# EAGLE board PWM sheild lilyGO (EAGLE 9.6.2)
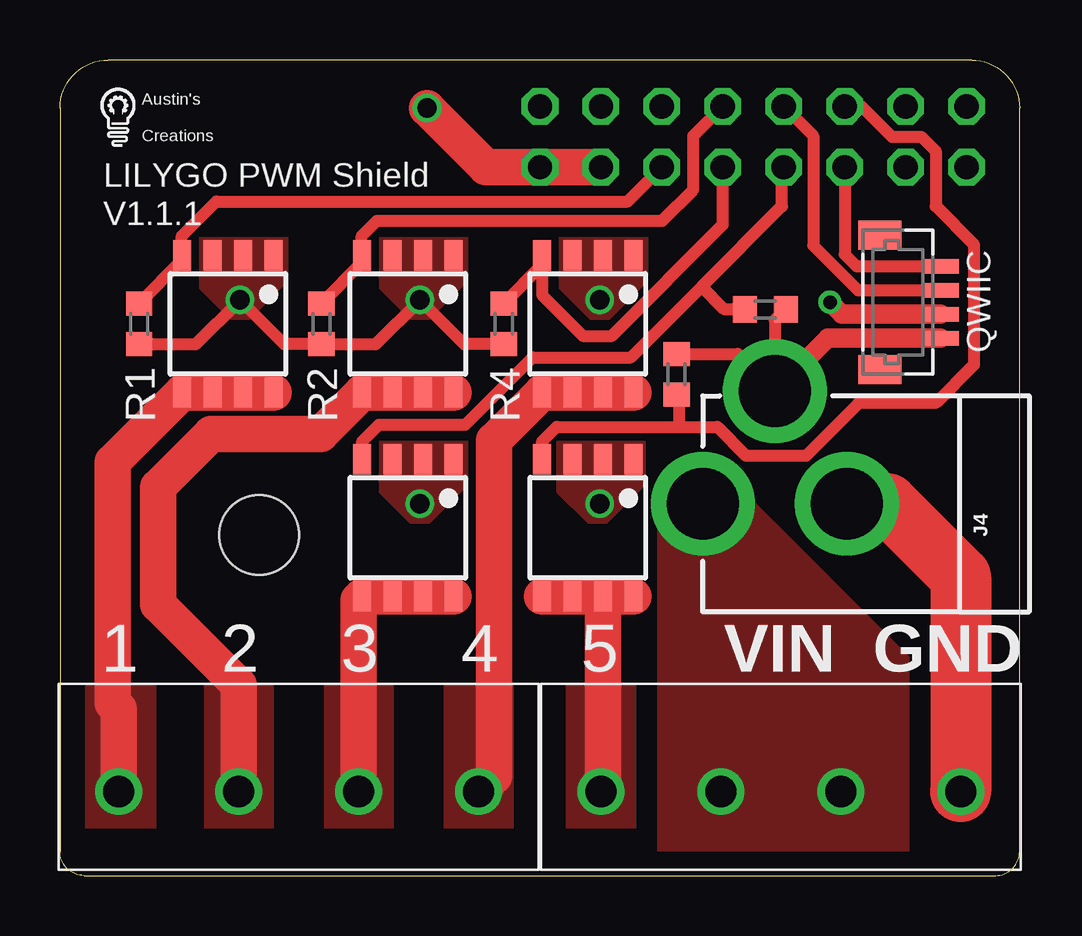
[diagram p0: board, top side]
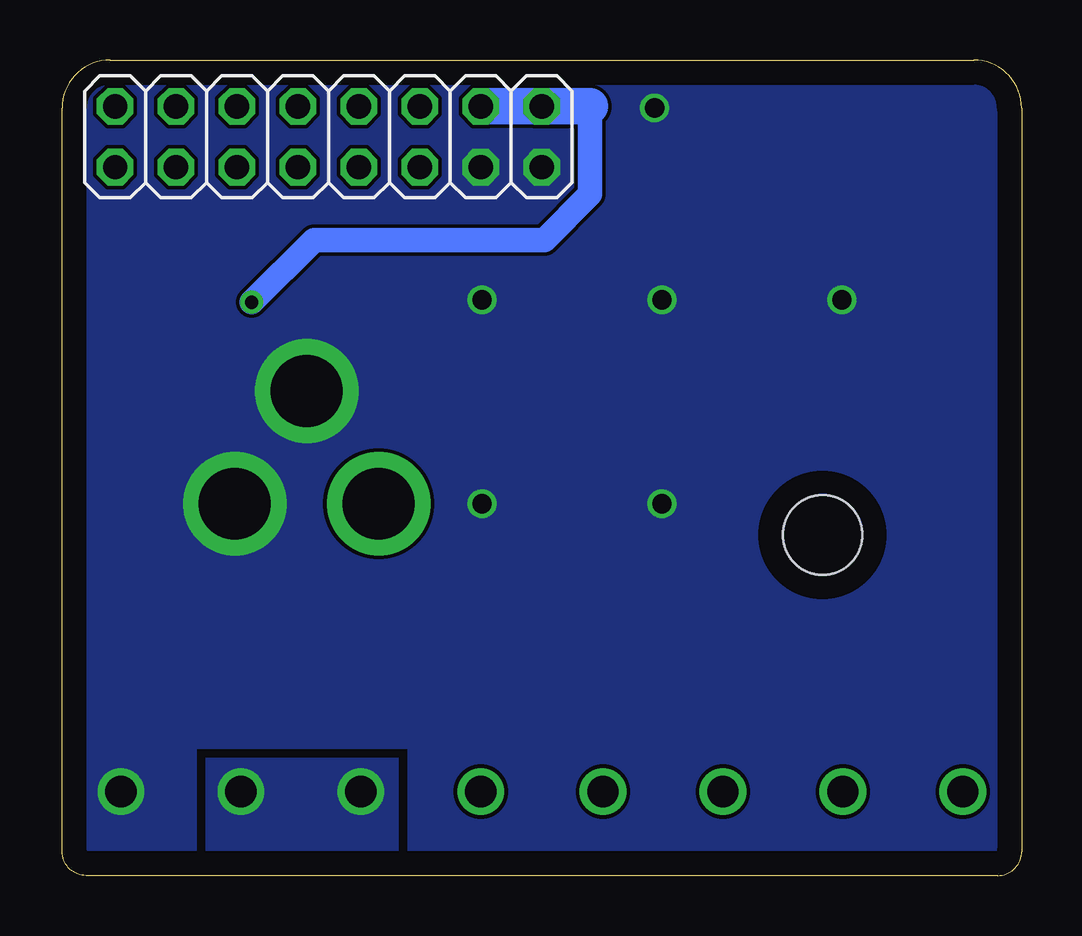
[diagram p1: board, bottom side, seen from below]

Size 40 x 34 mm. Coordinates in mm from the lower left corner, seen from the top.
Outline: 1,0 39,0 arc90 40,1 40,32 arc90 38,34 2,34 arc90 0,32 0,1 arc90 1,0
Copper layers (1*16): Top 0.035mm / dielectric 1.5mm / Bottom 0.035mm
Design rules "default": minimum track width 6mil, minimum drill 0.35mm, track to track 6mil, track to pad 6mil, pad to pad 6mil, via to via 6mil, smd to smd 6mil, copper to edge 40mil, drill to drill 6mil, minimum pad ring 10mil, minimum via ring 8mil, stop-mask expansion 4mil, vias tented up to drill 0mil, thermal gap 10mil

## Footprints (pad centres in the part's own frame; a part is rotated, then mirrored left to right if it is on the bottom)
SM4838NSK = smd 0.76 x 1.27: D1 -1.905,2.86; D2 -0.635,2.86; D3 0.635,2.86; D4 1.905,2.86; G 1.905,-2.86; S1 -1.905,-2.86; S2 -0.635,-2.86; S3 0.635,-2.86
SCREWTERMINAL-4P-5MM = drill 1.3 pad 1.95: 1 0,0; 2 5,0; 3 10,0; 4 15,0
POWER_JACK_PTH = drill 2.997 pad 4.318: GND 0,7.7; GNDBREAK 4.7,10.7; PWR 0,13.7
2X08 = drill 1.016 octagon: 1 -8.89,-1.27; 2 -8.89,1.27; 3 -6.35,-1.27; 4 -6.35,1.27; 5 -3.81,-1.27; 6 -3.81,1.27; 7 -1.27,-1.27; 8 -1.27,1.27; 9 1.27,-1.27; 10 1.27,1.27; 11 3.81,-1.27; 12 3.81,1.27; 13 6.35,-1.27; 14 6.35,1.27; 15 8.89,-1.27; 16 8.89,1.27
R0603 = smd 1 x 1.1: 1 -0.85,0; 2 0.85,0
M3BOLTHOLE = hole 3.3: 0,0
BM04B-SRSS-TB = smd 0.6 x 1.55: 1 1.5,0; 2 0.5,0; 3 -0.5,0; 4 -1.5,0 | smd 1.2 x 1.8: M1 2.8,-2.525; M2 -2.8,-2.525

## Placement (x,y rotation side)
FET1  SM4838NSK  [SM4838NSK]  7,23 180 top
FET2  SM4838NSK  [SM4838NSK]  14.5,23 180 top
FET3  SM4838NSK  [SM4838NSK]  14.5,14.5 180 top
FET4  SM4838NSK  [SM4838NSK]  22,23 180 top
FET5  SM4838NSK  [SM4838NSK]  22,14.5 180 top
J1  SCREWTERMINAL-4P-5MM  [SCREWTERMINAL-4P-5MM]  2.45,3.5 0 top
J3  SCREWTERMINAL-4P-5MM  [SCREWTERMINAL-4P-5MM]  22.55,3.5 0 top
J4  POWER_JACK  [POWER_JACK_PTH]  40.5,15.5 90 top
JP1  [2X08]  28.9,30.8 0 bottom
R1  [R0603]  3.3,23 90 top
R2  [R0603]  10.9,23 90 top
R3  [R0603]  29.4,23.6 180 top
R4  [R0603]  18.5,23 90 top
R5  [R0603]  25.7,20.9 270 top
U$1  M3BOLTHOLE  [M3BOLTHOLE]  8.3,14.2 0 top
U$2  LOGO  [LOGO]  1.7,30.4 0 top
X1  BM04B-SRSS-TB  [BM04B-SRSS-TB]  36.7,23.9 270 top

## Library data of the parts
FET1-FET5 U$1 U$2 X1 = custom parts
J1 J3 = SamacSys_Parts; DESCRIPTION: Fixed Terminal Blocks Terminal block, screw type, 5.00, horizontal, 4 poles, CUI Blue, slotted screw, PCB mount; HEIGHT: 12.9mm; MANUFACTURER_NAME: CUI Inc.; MANUFACTURER_PART_NUMBER: TB001-500-04BE; MOUSER_PART_NUMBER: 490-TB001-500-04BE; MOUSER_PRICE-STOCK: https://www.mouser.co.uk/ProductDetail/CUI-Devices/TB001-500-04BE?qs=vLWxofP3U2xFd1xqNcHXZA%3D%3D
J4 = custom parts; PROD_ID: CONN-08197
JP1 = pinhead
R1-R5 = rcl; SPICEPREFIX: R

## Nets
1: FET1.D1 FET1.D2 FET1.D3 FET1.D4 J1.1
2: FET2.D1 FET2.D2 FET2.D3 FET2.D4 J1.2
3: FET3.D1 FET3.D2 FET3.D3 FET3.D4 J1.3
4: FET4.D1 FET4.D2 FET4.D3 FET4.D4 J1.4
5: FET5.D1 FET5.D2 FET5.D3 FET5.D4 J3.1
FET1: FET1.G JP1.11 R1.2
FET2: FET2.G JP1.10 R2.2
FET3: FET3.G JP1.7 R3.2
FET4: FET4.G JP1.9 R4.2
FET5: FET5.G JP1.6 R5.2
GND: FET1.S1 FET1.S2 FET1.S3 FET2.S1 FET2.S2 FET2.S3 FET3.S1 FET3.S2 FET3.S3 FET4.S1 FET4.S2 FET4.S3 FET5.S1 FET5.S2 FET5.S3 J3.4 J4.GND J4.GNDBREAK JP1.13 JP1.15 R1.1 R2.1 R3.1 R4.1 R5.1 X1.1
SCL: JP1.5 X1.4
SDA: JP1.8 X1.3
VCC: JP1.14 JP1.16 X1.2
VDD: J3.2 J3.3 J4.PWR

## Tracks (layer width: path | path; a pad name or v marks a point on that pad's centre or on a via)
1
  Top 1.524: FET1.D1 FET1.D2 FET1.D3 FET1.D4 2.2,17.25 2.2,7.2 2.45,6.95 J1.1
  pour Top (no thermals): 1,7.9 1,2 4,2 4,7.9
2
  Top 1.524: FET2.D1 FET2.D2 FET2.D3 FET2.D4 10.86,18.4 6.3,18.4 4.1,16.2 4.1,11.3 7.45,7.95 J1.2
  pour Top (no thermals): 6,7.9 6,2 8.9,2 8.9,7.9
3
  Top 1.524: FET3.D1 FET3.D2 FET3.D3 FET3.D4 12.45,11.49 J1.3
  pour Top (no thermals): 11,7.9 11,2 13.9,2 13.9,7.9
4
  Top 1.524: FET4.D1 FET4.D2 FET4.D3 FET4.D4 18.1,18.14 18.1,4.15 J1.4
  pour Top (no thermals): 16,7.9 16,2 18.9,2 18.9,7.9
5
  Top 1.524: FET5.D1 FET5.D2 | FET5.D2 FET5.D3 FET5.D4 | FET5.D2 22.64,3.58 J3.1
  pour Top (no thermals): 21.1,7.9 21.1,2 24,2 24,7.9
FET1
  Top 0.508: 5.08,25.88 5.08,26.66 6.51,28.1 23.66,28.1 JP1.11 | FET1.G 5.08,25.88 | R1.2 5.08,25.63 5.08,25.88
FET2
  Top 0.508: JP1.10 26.4,30.84 26.4,28.6 25.1,27.3 13.21,27.3 12.58,26.66 12.58,25.88 FET2.G 12.6,25.55 R2.2
FET3
  Top 0.508: FET3.G 12.6,18.09 13.3,18.8 16.9,18.8 19.7,21.6 23.8,21.6 26.75,24.55 | 26.75,24.55 30.1,27.9 30.1,29.46 JP1.7 | R3.2 27.7,23.6 26.75,24.55
FET4
  Top 0.508: FET4.G 20.09,25.6 20.09,25.45 | 20.09,25.45 20.09,24.2 21.8,22.5 23,22.5 27.63,27.13 JP1.9 | R4.2 20.09,25.45
FET5
  Top 0.508: FET5.G 20.09,18.09 20.7,18.7 25.8,18.7 | 25.8,18.7 27.4,18.7 28.6,17.5 31.1,17.5 33.3,19.7 36.5,19.7 38.1,21.3 38.1,26.3 36.5,27.9 36.5,30.2 35.9,30.8 34.68,30.8 33.41,32.07 JP1.6 | R5.2 25.8,19.95 25.8,18.7
GND  (via drill 0.8)
  Top 0.508: R5.1 28.25,21.75 J4.GNDBREAK 29.8,23.15 R3.1 | R4.1 16.85,22.15 v15,24 13.15,22.15 R2.1 9.35,22.15 v7.5,24 5.65,22.15 R1.1
  Top 0.813: X1.1 32,22.4 J4.GNDBREAK
  Top 1.524: JP1.13 JP1.15 17.77,29.53 v15.3,32
  Top 2.54: J4.GND 34.5,15.5 37.55,12.45 J3.4
  other vias: 22.5,24 15,15.5 22.5,15.5
  pour Top (no thermals): 20.8,26.6 20.8,24.5 22.1,23.2 22.9,23.2 24.5,24.8 24.5,26.6
  pour Top (no thermals): 13.3,26.6 13.3,24.5 14.6,23.2 15.4,23.2 17,24.8 17,26.6
  pour Top (no thermals): 5.8,26.6 5.8,24.5 7.1,23.2 7.9,23.2 9.5,24.8 9.5,26.6
  pour Top (no thermals): 13.3,18.1 13.3,16 14.6,14.7 15.4,14.7 17,16.3 17,18.1
  pour Top (no thermals): 20.7,18.1 20.7,16 22,14.7 22.8,14.7 24.4,16.3 24.4,18.1
  pour Bottom (no thermals): 0,0 0,34 40,34 40,0 34.4,0 34.4,5.3 25.6,5.3 25.6,0
SCL
  Top 0.508: JP1.5 32.71,25.89 33.2,25.4 X1.4
SDA
  Top 0.508: JP1.8 31.4,30.84 31.4,26.27 33.27,24.4 X1.3
VCC  (via drill 0.55)
  Top 0.813: X1.2 32.6,23.4 v32.1,23.9
  Bottom 1.016: 18,32.07 18,28.4 19.9,26.5 29.5,26.5 v32.1,23.9
  Bottom 1.524: JP1.14 JP1.16 18,32.07
VDD
  pour Top (no thermals): 24.9,7.9 24.9,0.3 35.4,0.3 35.4,7.9
  pour Bottom (no thermals): 26,4.9 26,1 34,1 34,4.9
  pour Top (no thermals): 24.9,16.25 24.9,7.9 35.4,7.9 35.4,9.1 28.25,16.25

## Text on the board
tPlace: LILYGO PWM Shield | V1.1.1 | QWIIC | 1 | 2 | 3 | 4 | 5 | VIN
tNames: GND